# Altium PCB 辉光管时钟2号.pcbdoc (part 1 of 2)
Units mil, origin at the board's own origin, x right, y up, seen from the top; angles counter-clockwise.
Board outline 9093.95 x 3420 mil, 2 copper layers (Top Layer, Bottom Layer); 109 components, 221 nets, 539 pads, 88 vias.
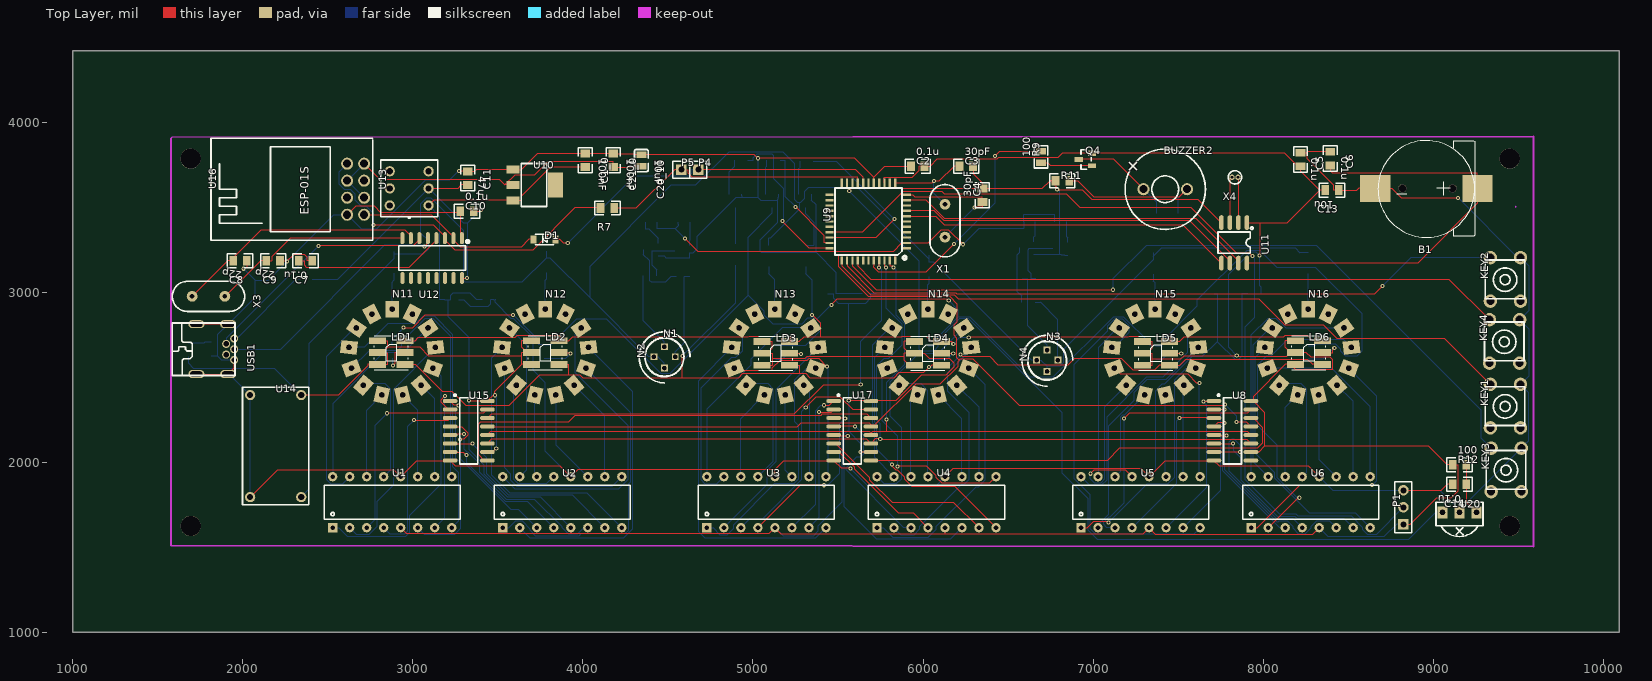
[diagram p0: Top Layer view]
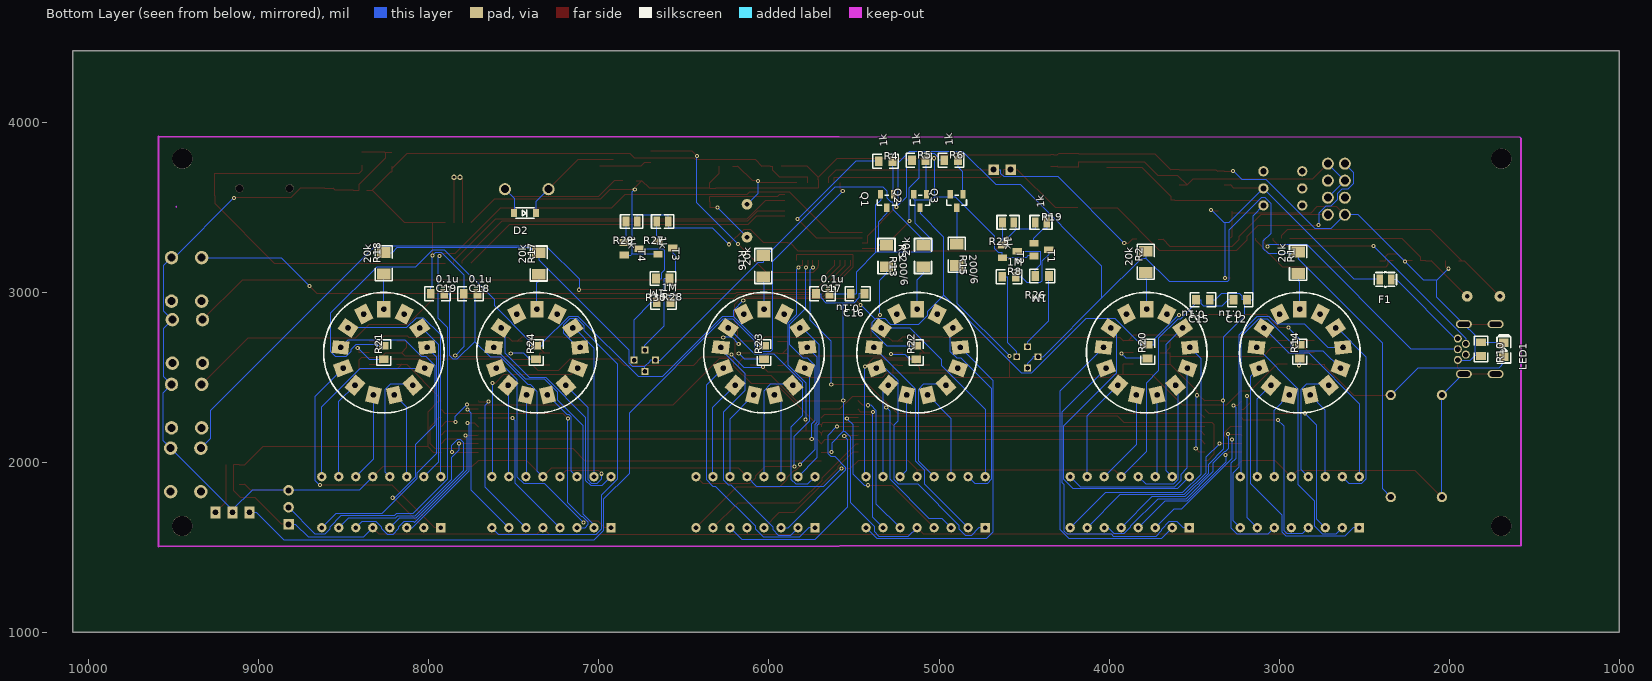
[diagram p1: Bottom Layer view, seen from below]

## Layer stack, top to bottom
Top Layer: signal copper (thickness not stored)
Dielectric: dielectric 12.6, FR-4, Dk 4.8
Bottom Layer: signal copper (thickness not stored)

## Board outline
10093.95,1000 1000,1000 1000,4420 10093.95,4420

## Components (designator, comment, footprint, x,y, rotation, side; value= is the part's Value field where it differs from the comment)
B1 "CR1220-2" BATTERY-2 8958.95,3610 r180 top
BUZZER2 "GMC1205YA-16R2048" GMC1205YA-12MM 7423.95,3605 r0 top
C1_0 "100nF" 0805#1 4013.95,3775 r270 top
C2 "0.1u" 0805#1 5968.95,3740 r0 top
C3 "30pF" 0805#1 6253.95,3740 r0 top
C4 "30pF" 0805#1 6348.95,3570 r90 top
C5 "0.1u" 0805#1 8218.95,3780 r270 top
C6 "0.1u" 0805#1 8393.95,3785 r270 top
C7 "0.1u" 0805#1 2368.95,3185 r180 top
C8 "22p" 0805#1 1983.95,3185 r180 top
C9 "22p" 0805#1 2178.95,3185 r180 top
C10 "0.1u" 0805#1 3318.95,3475 r0 top
C11 "47u" 0805#1 3323.95,3670 r270 top
C12 "0.1u" 0805#2 3228.95,2955 r180 bottom
C13 "10u" 0805#1 8403.95,3600 r180 top
C14 "0.1u" 0805#1 9153.95,1870 r180 top
C15 "0.1u" 0805#2 3448.95,2955 r180 bottom
C16 "0.1u" 0805#2 5478.95,2990 r180 bottom
C17 "0.1u" 0805#2 5683.95,2990 r0 bottom
C18 "0.1u" 0805#2 7753.95,2990 r0 bottom
C19 "0.1u" 0805#2 7948.95,2990 r0 bottom
C20_10 "10uF" CAP_0805 4343.95,3773.47 r270 top
C21_0 "100nF" 0805#1 4178.95,3775 r270 top
D1 "1N4148W" SOD-123#1 3773.95,3310 r0 top
D2 "1N4148W" SOD-123#2 7433.95,3465 r180 bottom
F1 "JK-SMD020SF" FUSE_0805 2375.49,3074.99 r180 bottom
KEY1 "TS-1102-5016" KEY-6.0*6.0-2 9423.95,2330 r90 top
KEY2 "TS-1102-5016" KEY-6.0*6.0-2 9423.95,3075 r90 top
KEY3 "TS-1102-5016" KEY-6.0*6.0-2 9428.95,1955 r90 top
KEY4 "TS-1102-5016" KEY-6.0*6.0-2 9418.95,2710 r90 top
LD1 "LED5050" LED5050 2873.95,2645 r0 top
LD2 "LED5050" LED5050 3778.95,2645 r0 top
LD3 "LED5050" LED5050 5133.95,2640 r0 top
LD4 "LED5050" LED5050 6028.95,2640 r0 top
LD5 "LED5050" LED5050 7368.95,2640 r0 top
LD6 "LED5050" LED5050 8268.95,2645 r0 top
LED1 "17-21SURC/S530-A2/TR8" LED-0805 1678.95,2661.35 r90 bottom
N1 "IN-3" IN-3 4463.95,2620 r0 top
N2 "IN-3" IN-3 4478.95,2600 r90 top
N3 "IN-3" IN-3 6713.95,2600 r0 top
N4 "IN-3" IN-3 6728.95,2580 r90 top
N11 "ИН-14" IN14 2878.95,2900 r0 top
N12 "ИН-14" IN14 3778.95,2900 r0 top
N13 "ИН-14" IN14 5128.95,2900 r0 top
N14 "ИН-14" IN14 6028.95,2900 r0 top
N15 "ИН-14" IN14 7363.95,2900 r0 top
N16 "ИН-14" IN14 8263.95,2900 r0 top
P1 "Header-Male-2.54_1x3" HDR-3X1/2.54 8823.95,1735 r90 top
P4 "Header-Male-2.54_1x1" HDR-1X1/2.54 4678.95,3720 r0 top
P5 "Header-Male-2.54_1x1" HDR-1X1/2.54 4578.95,3720 r0 top
Q1 "KST9013" SOT-23-3_3PIN_L2.90-W2.40-PITCH0.95-BR#1 5306.35,3535.63 r270 bottom
Q2 "KST9013" SOT-23-3_3PIN_L2.90-W2.40-PITCH0.95-BR#1 5111.55,3535.63 r270 bottom
Q3 "KST9013" SOT-23-3_3PIN_L2.90-W2.40-PITCH0.95-BR#1 4896.55,3535.63 r270 bottom
Q4 "KST9015" SOT-23-3_3PIN_L2.90-W2.40-PITCH0.95-BR#2 6953.95,3780 r0 top
R1 "20k" 1206 2888.95,3172.99 r270 bottom
R2 "20k" 1206 3783.95,3177.99 r270 bottom
R3 "20k" 1206 5093.95,3212.01 r270 bottom
R4 "1k" 0805#2 5313.95,3770 r0 bottom
R5 "1k" 0805#2 5118.95,3775 r0 bottom
R6 "1k" 0805#2 4928.95,3775 r0 bottom
R7 "100" 0805#1 4143.95,3495 r180 top
R8 "1M" 0805#2 4588.95,3090 r0 bottom
R9 "100" RES_0805#1 6693.95,3795 r90 top
R10 "1k" 0805#2 1813.95,2665 r90 bottom
R11 "100" 0805#1 6818.95,3655 r0 top
R12 "100" 0805#1 9153.95,1985 r0 top
R13 "200/6" 1206 5308.95,3212.01 r90 bottom
R14 "300" 0805#2 2878.95,2650 r270 bottom
R15 "200/6" 1206 4895.96,3220 r90 bottom
R16 "20k" 1206 6033.95,3152.99 r270 bottom
R17 "20k" 1206 7353.95,3167.99 r270 bottom
R18 "20k" 1206 8263.95,3170 r270 bottom
R19 "1k" RES_0805#2 4400.49,3410 r0 bottom
R20 "300" 0805#2 3773.95,2650 r270 bottom
R21 "300" 0805#2 8263.95,2645 r270 bottom
R22 "300" 0805#2 5133.95,2645 r270 bottom
R23 "300" 0805#2 6028.95,2645 r270 bottom
R24 "300" 0805#2 7368.95,2645 r270 bottom
R25 "1k" RES_0805#2 4593.95,3410 r180 bottom
R26 "1M" 0805#2 4393.95,3095 r180 bottom
R27 "1k" RES_0805#2 6625.49,3415 r180 bottom
R28 "1M" 0805#2 6618.95,2940 r0 bottom
R29 "1k" RES_0805#2 6807.41,3415 r180 bottom
R30 "1M" 0805#2 6623.95,3080 r180 bottom
T1 "BF820-NPN-SOT23-BEC" SOT23-BEC 4398.95,3250 r90 bottom
T2 "BF820-NPN-SOT23-BEC" SOT23-BEC 4583.95,3240 r90 bottom
T3 "BF820-NPN-SOT23-BEC" SOT23-BEC 6608.95,3260 r90 bottom
T4 "BF820-NPN-SOT23-BEC" SOT23-BEC 6806.95,3255 r90 bottom
U1 "K155ID1/SN74141" DIP16 2878.95,1765 r0 top
U2 "K155ID1/SN74141" DIP16 3878.95,1765 r0 top
U3 "K155ID1/SN74141" DIP16 5078.95,1765 r0 top
U4 "K155ID1/SN74141" DIP16 6078.95,1765 r0 top
U5 "K155ID1/SN74141" DIP16 7278.95,1765 r0 top
U6 "K155ID1/SN74141" DIP16 8278.95,1765 r0 top
U8 "74HC595D" SOP-16_150MIL 7818.95,2185 r0 top
U9 "STC15W4K48S4" LQFP-44 5678.95,3415 r90 top
U10 "AMS1117-3.3" SOT-223 3713.95,3630 r0 top
U11 "DS1302ZN+T&R" SOIC-8_150MIL 7828.95,3290 r270 top
U12 "CH340G" SOIC-16_150MIL 3113.95,3200 r180 top
U13 "K8-2213A-L1" KEY-8X8 2978.95,3610 r90 top
U14 "升压模块‘" SYMK2 2243.95,2095 r0 top
U15 "74HC595D" SOP-16_150MIL 3328.95,2185 r0 top
U16 "ESP-01S" ESP-01S 2663.95,3605 r90 top
U17 "74HC595D" SOP-16_150MIL 5583.95,2185 r0 top
U20 "VS1838B" VS1838B 9153.95,1705 r0 top
USB1 "Mini USB-B 5P-Female-TH_C46398" USB-MINI-2 1838.95,2665 r270 top
X1 "12MHz" OSC-49S-1 6128.95,3420 r180 top
X3 "12MHz" OSC-49S-1 1798.95,2975 r270 top
X4 "32.768KHz" 2*6 7833.95,3675 r180 top

## Footprints (in the part's own frame and the unit in brackets; to place one, negate y for a bottom-side part, rotate by r counter-clockwise, add the part's x,y. Pads: shape width x height; smd on the part's side, far side on the other; paste and mask are expansions set on the pad)
2*6 [mm]
  round 0.8 hole 0.4: 1(-0.45,0) 2(0.45,0)
  silkscreen extent -1,-1 1,1
0805#1 [mm]
  rect 1.16x1.45 smd: 1(-1.016,0) 2(1.016,0)
  silkscreen extent -1.9,-1.03 1.87,1.04
0805#2 [mm]
  rect 1.16x1.45 smd: 1(1.016,0) 2(-1.016,0)
  silkscreen extent -1.87,-1.04 1.9,1.03
1206 [mil]
  rect 63x78.74 smd: 1(62.99,0) 2(-62.99,0)
  silkscreen extent -103,-50 103,50
BATTERY-2 [mm]
  round 1.2 hole 1.2: 0(-3.912,0) 0(3.581,0)
  rect 4.5x4 smd: 1(-7.62,0) 2(7.62,0)
  silkscreen extent -7.22,-7.14 7.22,7.3
CAP_0805 [mm]
  rect 1x1.5 smd: 1(-0.85,0) 2(0.85,0)
  silkscreen extent -1.65,-1.02 1.65,1.02
DIP16 [mil]
  rect 55x55 hole 28: 1(-350,-150)
  round 55 hole 28: 2(-250,-150) 3(-150,-150) 4(-50,-150) 5(50,-150) 6(150,-150) 7(250,-150) 8(350,-150) 9(350,150) 10(250,150) 11(150,150) 12(50,150) 13(-50,150) 14(-150,150) 15(-250,150) 16(-350,150)
  silkscreen extent -400,-100 400,100
ESP-01S [mm]
  round 1.8 hole 1.2: 1(-3.81,1.27) 2(-1.27,1.27) 3(1.27,1.27) 4(3.81,1.27) 5(3.81,-1.27) 6(1.27,-1.27) 7(-1.27,-1.27) 8(-3.81,-1.27)
  silkscreen extent -7.62,-2.54 7.62,21.59
FUSE_0805 [mm]
  rect 1x1.5 smd: 1(0.85,0) 2(-0.85,0)
  silkscreen extent -1.65,-1.14 1.65,1.14
GMC1205YA-12MM [mm]
  round 1.8 hole 1.2: 1(-3.25,0) 2(3.25,0)
  silkscreen extent -6,-6 6,6
HDR-1X1/2.54 [mil]
  rect 62x62 hole 35: 1(0,0)
  silkscreen extent -50,-50 50,50
HDR-3X1/2.54 [mil]
  rect 62x62 hole 35: 1(-100,0)
  round 62 hole 35: 2(0,0) 3(100,0)
  silkscreen extent -150,-50 150,50
IN14 [mil]
  rect 78.74x98.42 hole 30 slot 30.2 at 0 deg: 1(0,0)
  rect 98.28x78.74 hole 30 slot 30.2 at 27.69 deg rot 117.7: 2(-118.92,-29.31)
  rect 98.28x78.74 hole 30 slot 30.2 at 55.38 deg rot 145.39: 3(-210.6,-110.53)
  rect 98.28x78.74 hole 30 slot 30.2 at 83.08 deg rot 173.09: 4(-254.04,-225.06)
  rect 98.28x78.75 hole 30 slot 30.2 at 110.77 deg rot 20.76: 5(-239.28,-346.65)
  rect 98.28x78.74 hole 30 slot 30.2 at 138.46 deg rot 48.46: 6(-169.7,-447.45)
  rect 98.28x78.74 hole 30 slot 30.2 at 166.15 deg rot 76.16: 7(-61.25,-504.37)
  rect 98.28x78.74 hole 30 slot 30.2 at 13.85 deg rot 103.84: 8(61.23,-504.38)
  rect 98.28x78.74 hole 30 slot 30.2 at 41.54 deg rot 131.54: 9(169.69,-447.46)
  rect 98.28x78.74 hole 30 slot 30.2 at 69.23 deg rot 159.23: 10(239.27,-346.66)
  rect 98.28x78.74 hole 30 slot 30.2 at 96.92 deg rot 6.91: 11(254.04,-225.06)
  rect 98.28x78.74 hole 30 slot 30.2 at 124.62 deg rot 34.61: 12(210.6,-110.53)
  rect 98.28x78.74 hole 30 slot 30.2 at 152.31 deg rot 62.3: 13(118.92,-29.31)
IN-3 [mm]
  rect 1.024x1.024 hole 0.6 slot 0.605 at 0 deg: A(-1.175,0) K(2,0)
  silkscreen extent -3.4,-2.9 4.22,3.73
KEY-6.0*6.0-2 [mm]
  round 2 hole 1.2: 1(3.25,-2.25) 2(-3.25,-2.25) 3(3.25,2.25) 4(-3.25,2.25)
  silkscreen extent -2.9,-2.9 2.9,3
KEY-8X8 [mil]
  round 60 hole 36: 1(-100.4,-114.17) 2(0,-114.17) 3(100.4,-114.17) 4(-100.37,114.17) 5(0,114.17) 6(100.39,114.17)
  silkscreen extent -176,-167 167,167
LED5050 [mil]
  rect 100x39.37 smd: 1(-80,70) 2(-80,0) 3(-80,-70) 4(80,-70) 5(80,0) 6(80,70)
  silkscreen extent -100,-100 100,100
LED-0805 [mil]
  rect 51.2x55.1 smd: 1(-41.35,0) 2(41.35,0)
  silkscreen extent -78,-40 88,41
LQFP-44 [mil]
  rect 13.8x47.24 smd: 1(-157,-228) 2(-126,-228) 3(-94,-228) 4(-63,-228) 5(-31,-228) 6(0,-228) 7(31,-228) 8(63,-228) 9(94,-228) 10(126,-228) 11(157,-228) 23(157,228) 24(126,228) 25(94,228) 26(63,228) 27(31,228) 28(0,228) 29(-31,228) 30(-63,228) 31(-94,228) 32(-126,228) 33(-157,228)
  rect 47.24x13.8 smd: 12(228,-157) 13(228,-126) 14(228,-94) 15(228,-63) 16(228,-31) 17(228,0) 18(228,31) 19(228,63) 20(228,94) 21(228,126) 22(228,157) 34(-228,157) 35(-228,126) 36(-228,94) 37(-228,63) 38(-228,31) 39(-228,0) 40(-228,-31) 41(-228,-63) 42(-228,-94) 43(-228,-126) 44(-228,-157)
  silkscreen extent -223,-223 197,197
OSC-49S-1 [mm]
  round 1.6 hole 0.7: 1(0,2.45) 2(0,-2.45)
  silkscreen extent -2.25,-5.39 2.25,5.39
RES_0805#1 [mm]
  rect 1x1.5 smd: 1(-0.85,0) 2(0.85,0)
  silkscreen extent -1.65,-1.02 1.65,1.02
RES_0805#2 [mm]
  rect 1x1.5 smd: 1(0.85,0) 2(-0.85,0)
  silkscreen extent -1.65,-1.02 1.65,1.02
SOD-123#1 [mil]
  rect 35.8x48 smd: 1(64,0) 2(-64,0)
  silkscreen extent -53,-31 53,31
SOD-123#2 [mil]
  rect 35.8x48 smd: 1(-64,0) 2(64,0)
  silkscreen extent -53,-31 53,31
SOIC-8_150MIL [mm]
  oval 2.2x0.7 smd: 1(-3.023,1.905) 2(-3.023,0.635) 3(-3.023,-0.635) 4(-3.023,-1.905) 5(3.023,-1.905) 6(3.023,-0.635) 7(3.023,0.635) 8(3.023,1.905)
  silkscreen extent -2.37,-2.41 1.55,2.83
SOIC-16_150MIL [mm]
  oval 0.6x1.8 smd: 1(-4.445,-2.972) 2(-3.175,-2.972) 3(-1.905,-2.972) 4(-0.635,-2.972) 5(0.635,-2.972) 6(1.905,-2.972) 7(3.175,-2.972) 8(4.445,-2.972) 9(4.445,2.972) 10(3.175,2.972) 11(1.905,2.972) 12(0.635,2.972) 13(-0.635,2.972) 14(-1.905,2.972) 15(-3.175,2.972) 16(-4.445,2.972)
  silkscreen extent -5.51,-2.69 4.98,1.83
SOP-16_150MIL [mm]
  oval 2.2x0.6 smd: 1(-2.769,4.445) 2(-2.769,3.175) 3(-2.769,1.905) 4(-2.769,0.635) 5(-2.769,-0.635) 6(-2.769,-1.905) 7(-2.769,-3.175) 8(-2.769,-4.445) 9(2.769,-4.445) 10(2.769,-3.175) 11(2.769,-1.905) 12(2.769,-0.635) 13(2.769,0.635) 14(2.769,1.905) 15(2.769,3.175) 16(2.769,4.445)
  silkscreen extent -2.21,-4.95 1.35,5.46
SOT23-BEC [mil]
  rect 39.4x55.1 smd: B(37,43) C(0,-43) E(-37,43)
SOT-23-3_3PIN_L2.90-W2.40-PITCH0.95-BR#1 [mm]
  rect 1.25x0.7 smd: 1(-1,0.95)
  rect 1.25x0.8 smd: 2(-1,-0.95) 3(1,0)
  silkscreen extent -0.9,-1.46 0.65,1.46
SOT-23-3_3PIN_L2.90-W2.40-PITCH0.95-BR#2 [mm]
  rect 1.25x0.7 smd: 1(1,-0.95)
  rect 1.25x0.8 smd: 2(1,0.95) 3(-1,0)
  silkscreen extent -0.65,-1.46 0.9,1.46
SOT-223 [mm]
  rect 2x1.2 smd: 1(-3.175,2.3) 2(-3.175,0) 3(-3.175,-2.3)
  rect 2.3x3.8 smd: 4(3.175,0)
  silkscreen extent -1.93,-3.2 1.87,3.2
SYMK2 [mil]
  round 60 hole 36: 1(-200,300) 2(-200,-300) 3(100,300) 4(100,-300)
  silkscreen extent -245,-345 145,345
USB-MINI-2 [mm]
  oval 1.2x2.4 hole 0.8 slot 1.8 at 90 deg: 0(-3.72,1.924) 0(-3.72,-2.826) 0(3.72,1.924) 0(3.72,-2.826)
  round 1.2 hole 0.8: 1(-1.58,2.826) 2(-0.78,1.622) 3(0.02,2.826) 4(0.82,1.622) 5(1.62,2.826)
  silkscreen extent -3.89,-6.42 3.96,2.93
VS1838B [mil]
  rect 60x70 hole 30 slot 30.2 at 0 deg: 1(-100,0)
  rect 60x69.88 hole 30 slot 30.2 at 0 deg: 2(0,0) 3(100,0)
  silkscreen extent -138,-142 138,59

## Free pads (board coordinates)
  round 119 hole 119: 2(1693.95,1625) 2(1693.95,3785) 2(9448.95,1625) 2(9448.95,3785)

## Via types
v1: diameter 24, hole 12, Top Layer to Bottom Layer, 88 vias

## Nets (pads, with @x,y where several pads share a name; then routed paths per layer and width w, separated by ;. In a path a pad name is that pad's centre, name@x,y a point inside that pad or via, vN(x,y) a via of type N, cw(c..) or ccw(c..) an arc to the next point about the centre after c; other vN are vias at no path point)
180V: N1.A N2.A N3.A N4.A R1.2 R2.2 R3.2 R16.2 R17.2 R18.2 U14.4 | length 10577.8
  Bottom Layer w6: U14.4@2343.95,1795 2392.35,1843.4 2392.35,2698.7 2888.95,3195.4 R1.2@2888.95,3225.2 ; R1.2@2888.95,3235.98 R1.2@2888.95,3225.2 ; R2.2@3783.95,3240.98 3783.95,3200.4 ; N2.A@4478.95,2553.74 4478.95,2583 4446.95,2615 4446.95,2620 4432.35,2620 4417.65,2620 4388.45,2620 4042.25,2966.1 ; R3.2@5093.95,3275 5093.95,3315.6 5100.75,3315.6 5271.55,3486.4 5271.55,3527.6 ; R16.2@6033.95,3215.98 R16.2@6033.95,3195.9 ; N4.A@6728.95,2533.74 6728.95,2563 ; R17.2@7353.95,3230.98 R17.2@7353.95,3210.7 ; R18.2@8263.95,3232.99 8215.45,3233 8188.85,3259.6 7402.85,3259.6 R17.2@7353.95,3210.7 ; R1.2@2888.95,3225.2 3062.25,3225.2 3093.15,3256.1 3093.15,3301.5 3048.15,3346.5 3048.15,3520 3081.95,3553.7 3107.05,3553.7 3295.85,3365 3295.85,3069.4 3304.45,3060.8 3644.45,3060.8 3783.95,3200.4 ; 3783.95,3200.4 3808.05,3200.4 4042.25,2966.1 ; 4042.25,2966.1 4042.25,3152.8 4520.15,3630.6 4664.75,3630.6 4860.15,3825.9 5173.95,3825.9 5242.05,3757.9 5242.05,3546.2 5260.75,3527.6 5271.55,3527.6 ; 5271.55,3527.6 5281.95,3527.6 5305.45,3551 5305.45,3594 5326.85,3615.4 5614.55,3615.4 R16.2@6033.95,3195.9 ; R16.2@6033.95,3195.9 6033.95,3175.4 6063.05,3175.4 6638.45,2600 6667.65,2600 6682.35,2600 6696.95,2600 6696.95,2595 6728.95,2563 ; 6728.95,2563 6802.85,2563 6824.15,2584.3 6824.15,2660.6 7353.95,3190.4 R17.2@7353.95,3210.7
C3_1: C3.1 U9.12 X1.2 | length 582.1
  Top Layer w6: U9.12@5835.95,3643 6053.25,3643 v1(6063.75,3653.4) 6095.45,3653.4 6182.05,3740 C3.1@6213.95,3740
  Bottom Layer w6: v1(6063.75,3653.4) 6063.75,3581.7 X1.2@6128.95,3516.46
C4_1: C4.1 U9.11 X1.1 | length 802.3
  Top Layer w6: U9.11@5906.95,3572 5939.65,3572 5949.75,3561.9 6348.95,3561.9 C4.1@6348.95,3530 6348.95,3498.1 v1(6303.45,3498.1)
  Bottom Layer w6: X1.1@6128.95,3323.54 v1(6303.45,3498.1)
C6_2: B1.1 C6.2 U11.8 | length 2579.3
  Top Layer w6: U11.8@7903.95,3171 8907.75,3171 9258.95,3522.2 9258.95,3566.1 B1.1@9258.95,3610 9258.95,3697.8 8409.15,3697.8 8393.95,3713.1 C6.2@8393.95,3745
CH340-D+: U12.5 USB1.3 | length 1432.8
  Top Layer w6: v1(3069.95,3269.2) 3088.95,3288.2 U12.5@3088.95,3317
  Bottom Layer w6: USB1.3@1950.2,2664.21 2222.35,2664.2 2835.65,3277.5 3061.55,3277.5 v1(3069.95,3269.2)
CH340-D-: U12.6 USB1.2 | length 1417.2
  Top Layer w6: v1(2446.55,3272.3) 3002.05,3272.3 3038.95,3309.3 U12.6@3038.95,3317
  Bottom Layer w6: USB1.2@1902.81,2695.71 1902.85,2728.5 v1(2446.55,3272.3)
D2_1: BUZZER2.2 D2.1 R11.2 | length 913.6
  Top Layer w6: R11.2@6858.95,3655 6890.85,3655 6908.05,3655 7003.35,3559.7 7506.55,3559.7 BUZZER2.2@7551.95,3605
  Bottom Layer w6: D2.1@7497.95,3465 7497.95,3551 BUZZER2.2@7551.95,3605
D2_2: BUZZER2.1 D2.2 Q4.3 | length 624.6
  Top Layer w6: Q4.3@6914.58,3780 7121.05,3780 BUZZER2.1@7296,3605
  Bottom Layer w6: BUZZER2.1@7296,3605 7369.95,3531 D2.2@7369.95,3465
GND: B1.2 C1_0.1 C2.1 C3.2 C4.2 C5.1 C6.1 C7.1 C8.1 C9.1 C10.1 C11.1 C12.2 C13.1 C14.2 C15.2 C16.2 C17.2 C18.2 C19.2 C20_10.1 C21_0.1 KEY1.1 KEY2.1 KEY3.1 KEY4.1 P1.3 Q1.2 Q2.2 Q3.2 R10.2 R11.1 T1.E T2.E T3.E T4.E U1.12 U2.12 U3.12 U4.12 U5.12 U6.12 U8.8 U9.16 U10.1 U11.4 U12.1 U14.1 U14.2 U15.8 U16.1 U17.8 U20.2 USB1.0 USB1.5 | length 28039.1
  Top Layer w6: USB1.0@1727.65,2518.5 1914.75,2518.5 1950.25,2554 USB1.5@1950.2,2601.22 ; USB1.0@1727.65,2811.4 USB1.0@1914.75,2811.4 ; v1(2005.65,3137.7) 2015.35,3147.4 2023.95,3147.4 C8.1@2023.95,3185 ; U14.2@2043.95,1795 2203.15,1954.2 2889.75,1954.2 U1.12@2928.95,1915 3023.95,2010 U15.8@3219.95,2010 3253.65,1976.3 3867.65,1976.3 U2.12@3928.95,1915 3970.45,1956.5 5128.95,1956.5 ; C9.1@2218.95,3185 2250.85,3185 2254.45,3185 v1(2260.05,3179.4) 2260.05,3181 2301.65,3222.6 2363.35,3222.6 2377.05,3208.9 2377.05,3185 C7.1@2408.95,3185 ; U16.1@2613.95,3455 2663.95,3505 2775.65,3505 2812.65,3468 C10.1@3278.95,3468 ; v1(3271.25,3713.2) 3283.15,3713.2 3286.35,3710 C11.1@3323.95,3710 3361.55,3710 3372.15,3720.5 3540.45,3720.5 3588.95,3720.5 3637.45,3720.5 3731.85,3815 C1_0.1@4013.95,3815 C21_0.1@4178.95,3815 4297.25,3815 4305.35,3806.9 4324.65,3806.9 C20_10.1@4343.95,3806.93 5008.95,3806.9 v1(5028.85,3787.1) 5598.65,3787.1 5709.95,3675.7 ; C10.1@3278.95,3475 C10.1@3278.95,3468 ; U12.1@3288.95,3317 3278.95,3327 C10.1@3278.95,3468 ; U3.12@5128.95,1915 5128.95,1956.5 ; v1(5573.35,1964.3) 5520.65,1964.3 U17.8@5474.95,2010 5182.45,2010 5128.95,1956.5 ; C2.1@5928.95,3740 5774.25,3740 5709.95,3675.7 ; U4.12@6128.95,1915 6177.65,1963.7 7280.25,1963.7 U5.12@7328.95,1915 7423.95,2010 U8.8@7709.95,2010 7744.65,1975.3 8268.65,1975.3 U6.12@8328.95,1915 ; C3.2@6293.95,3740 6293.95,3696.9 6348.95,3641.9 C4.2@6348.95,3610 ; R11.1@6778.95,3655 6747.05,3655 ; U11.4@7753.95,3409 7615.45,3547.5 6991.55,3547.5 6936.35,3602.8 v1(6788.75,3602.8) 6788.75,3613.3 6747.05,3655 ; C5.1@8218.95,3820 8253.55,3820 8256.55,3820 ; C6.1@8393.95,3825 8261.55,3825 8256.55,3820 ; P1.3@8823.95,1835 9047.05,1835 9082.05,1870 C14.2@9113.95,1870 ; v1(9145.25,3554.5) 8812.05,3554.5 8756.65,3610 B1.2@8658.95,3610 8610.15,3610 8561.25,3610 8551.25,3600 C13.1@8443.95,3600 8412.05,3600 8412.05,3631.9 8256.55,3787.4 8256.55,3820 ; 5709.95,3675.7 5709.95,3659.4 U9.16@5709.95,3643 5709.95,3613.3 5713.25,3610 6311.35,3610 C4.2@6348.95,3610 ; C4.2@6348.95,3610 6702.05,3610 6747.05,3655
  Bottom Layer w6: R10.2@1813.95,2625 1851.55,2625 ; USB1.0@1914.75,2518.5 1920.45,2518.5 U14.1@2043.95,2395 U14.2@2043.95,1795 ; USB1.5@1950.2,2601.22 1948.95,2600 1876.55,2600 1851.55,2625 ; v1(2005.65,3137.7) 2074.45,3068.8 ; C12.2@3268.95,2955 3300.85,2955 3338.55,2917.3 3443.35,2917.3 3457.05,2931 3457.05,2955 3477.05,2955 C15.2@3483.45,2955 ; v1(3271.25,3713.2) 3218.25,3660.2 3076.85,3660.2 2787.85,3371.2 2697.75,3371.2 U16.1@2613.95,3455 2535.65,3455 v1(2260.05,3179.4) 2149.45,3068.8 2074.45,3068.8 ; C15.2@3488.95,2955 C15.2@3483.45,2955 ; U2.12@3928.95,1915 3778.95,2065 3778.95,2468.2 3707.65,2539.4 3707.65,2730.8 3593.75,2844.7 3580.05,2844.7 3483.45,2941.3 C15.2@3483.45,2955 ; T1.E@4441.95,3213 4478.65,3213 4488.65,3203 T2.E@4626.95,3203 4626.95,3231.8 4648.55,3231.8 4672.15,3255.4 4672.15,3328.4 4901.85,3558.1 Q3.2@4933.95,3558.1 ; Q3.2@4933.95,3575 4933.95,3566.6 Q3.2@4933.95,3558.1 ; v1(5028.85,3787.1) 5028.85,3558.1 ; Q2.2@5148.95,3575 5148.95,3558.1 5148.95,3548.1 5142.05,3541.3 ; Q1.2@5343.75,3575 5343.75,3541.3 5370.65,3514.4 5370.65,3234.4 ; v1(5573.35,1964.3) 5677.45,1860.1 6074.15,1860.1 U4.12@6128.95,1915 ; C17.2@5643.95,2990 C16.2@5518.95,2990 5487.05,2990 5487.05,3118 5370.65,3234.4 ; T3.E@6651.95,3223 6802.75,3223 ; v1(6788.75,3602.8) 6802.75,3588.8 6802.75,3223 ; T4.E@6849.95,3218 6831.65,3218 6813.35,3218 6808.35,3223 6802.75,3223 ; U5.12@7328.95,1915 7363.95,1950 7363.95,2417.3 7404.65,2458 7418.25,2458 7579.85,2619.6 7639.95,2619.6 7729.95,2709.6 ; C18.2@7713.95,2990 7729.95,2990 7729.95,2709.6 ; C19.2@7908.95,2990 7877.05,2990 7877.05,2626.7 7855.55,2605.3 7834.25,2605.3 7729.95,2709.6 ; U6.12@8328.95,1915 8408.95,1835 P1.3@8823.95,1835 9038.35,1835 U20.2@9153.95,1719.4 ; v1(9145.25,3554.5) 9496.85,3202.9 9512.55,3202.9 9561.05,3154.5 9561.05,2891.4 9507.55,2837.9 9561.05,2784.5 9561.05,2506.4 9512.55,2457.9 9562.05,2408.4 9562.05,2127.5 9517.55,2082.9 U20.2@9153.95,1719.4 ; U20.2@9153.95,1705 U20.2@9153.95,1719.4 ; 1851.55,2625 1851.55,2748.3 1914.75,2811.4 2074.45,2971.2 2074.45,3068.8 ; Q3.2@4933.95,3558.1 5028.85,3558.1 ; 5028.85,3558.1 5045.75,3541.3 5142.05,3541.3 ; 5142.05,3541.3 5142.05,3407.1 5039.25,3304.3 5039.25,3243.1 5047.95,3234.4 5370.65,3234.4
KEY1_2: KEY1.2
KEY1_4: KEY1.4
KEY2_2: KEY2.2
KEY2_4: KEY2.4
KEY3_2: KEY3.2
KEY3_4: KEY3.4
KEY4_2: KEY4.2
KEY4_4: KEY4.4
LD1: LD1.6 LD2.6 LD3.6 LD4.6 LD5.6 LD6.6 R13.2 | length 6071.4
  Top Layer w6: LD1.6@2953.95,2715 3013.05,2715 3033.45,2735.4 3603.25,2735.4 3613.45,2745.5 3857.95,2745.5 LD2.6@3888.55,2715 ; LD2.6@3858.95,2715 LD2.6@3888.55,2715 ; LD3.6@5213.95,2710 LD3.6@5243.55,2710 ; v1(5348.15,2866.4) 5398.05,2816.5 5398.05,2735.4 ; v1(6177.75,2694.4) 6168.05,2704 6168.05,2710 LD4.6@6108.95,2710 6079.45,2710 6049.85,2710 6021.05,2738.8 5874.45,2738.8 5871.05,2735.4 5398.05,2735.4 ; v1(6268.65,2733.8) 7206.95,2733.8 7211.95,2738.8 7449.75,2738.8 LD5.6@7478.55,2710 ; LD5.6@7448.95,2710 LD5.6@7478.55,2710 ; LD6.6@8348.95,2715 8289.85,2715 8261.05,2743.8 8126.05,2743.8 8117.75,2735.4 7533.45,2735.4 7508.05,2710 LD5.6@7478.55,2710 ; LD2.6@3888.55,2715 3918.05,2715 3938.45,2735.4 4973.55,2735.4 4976.95,2738.8 5214.75,2738.8 LD3.6@5243.55,2710 ; LD3.6@5243.55,2710 5273.05,2710 5298.45,2735.4 5398.05,2735.4
  Bottom Layer w6: R13.2@5308.95,3149.02 5308.95,3108.4 5348.15,3069.3 v1(5348.15,2866.4) ; v1(6177.75,2694.4) 6217.15,2733.8 v1(6268.65,2733.8)
LD1_5: LD1.5 R14.1 | length 183.7
  Top Layer w6: v1(2883.15,2568.5) 2894.85,2580.2 2894.85,2645 LD1.5@2953.95,2645
  Bottom Layer w6: R14.1@2878.95,2610 2878.95,2572.6 v1(2883.15,2568.5)
LD2: Q2.3 R14.2 R20.2 R21.2 R22.2 R23.2 R24.2 | length 9085.9
  Top Layer w6: v1(2945.25,2791.3) 2998.65,2791.3 3073.15,2865.8 v1(3589.85,2865.8) ; v1(5461.15,2924.8) 5496.75,2960.5 6141.45,2960.5 v1(6150.95,2951)
  Bottom Layer w6: R14.2@2878.95,2690 2878.95,2721.9 2945.25,2788.2 v1(2945.25,2791.3) ; v1(3589.85,2865.8) 3736.35,2719.3 3736.35,2690 R20.2@3773.95,2690 3811.55,2690 3965.45,2843.8 4137.95,2843.8 4458.05,2523.7 4514.35,2523.7 4972.05,2981.4 ; Q2.3@5111.55,3496.26 5111.55,3462.5 4972.05,3323 4972.05,2981.4 ; R22.2@5133.95,2685 5308.75,2685 5396.15,2772.4 5396.15,2819.6 5375.95,2839.7 ; v1(5461.15,2924.8) 5375.95,2839.7 ; R23.2@6028.95,2685 6030.35,2685 6066.55,2685 6066.55,2714.2 6208.35,2855.9 ; v1(6150.95,2951) 6208.35,2893.6 6208.35,2855.9 ; R21.2@8263.95,2685 8301.55,2685 8309.75,2693.1 8426.75,2693.1 8454.85,2665 8454.85,2652.5 8484.85,2622.6 8548.75,2622.6 8578.55,2652.4 8578.55,2876.2 8307.15,3147.6 8078.85,3147.6 7978.95,3247.5 7906.15,3247.5 7613.25,2954.6 7613.25,2919.1 7406.55,2712.4 7406.55,2685 R24.2@7368.95,2685 7331.35,2685 7331.35,2702.1 7177.15,2856.3 7120.65,2856.3 6766.75,2502.5 6627.55,2502.5 6274.05,2855.9 6208.35,2855.9 ; 4972.05,2981.4 5066.45,2887.1 5066.45,2864.4 5118.95,2811.9 5285.85,2811.9 5319.25,2845.3 5370.35,2845.3 5375.95,2839.7
LD2.1: LD2.5 R20.1 | length 236.9
  Top Layer w6: LD2.5@3858.95,2645 3918.05,2645 3924.35,2638.7 v1(3927.65,2638.7)
  Bottom Layer w6: R20.1@3773.95,2610 3898.95,2610 v1(3927.65,2638.7)
LD2.2: LD3.5 R22.1 | length 231.1
  Top Layer w6: LD3.5@5213.95,2640 5273.05,2640 5277.25,2635.8 v1(5282.25,2635.8)
  Bottom Layer w6: R22.1@5133.95,2605 5171.55,2605 5202.45,2635.8 v1(5282.25,2635.8)
LD2.3: LD4.5 R23.1 | length 231.7
  Top Layer w6: LD4.5@6108.95,2640 v1(6177.55,2640)
  Bottom Layer w6: R23.1@6028.95,2605 6142.55,2605 v1(6177.55,2640)
LD2.4: LD5.5 R24.1 | length 232.5
  Top Layer w6: LD5.5@7448.95,2640 7508.05,2640 v1(7517.95,2640)
  Bottom Layer w6: R24.1@7368.95,2605 7406.55,2605 7441.55,2640 v1(7517.95,2640)
LD2.5: LD6.5 R21.1 | length 271.5
  Top Layer w6: LD6.5@8348.95,2645 8408.05,2645 8408.05,2662.4 v1(8417.65,2672)
  Bottom Layer w6: R21.1@8263.95,2605 8350.65,2605 v1(8417.65,2672)
LD3: LD1.4 LD2.4 LD3.4 LD4.4 LD5.4 LD6.4 R15.2 | length 6855.8
  Top Layer w6: LD1.4@2953.95,2575 3014.65,2575 3173.05,2416.5 3229.75,2416.5 3311.25,2335 3567.05,2335 3745.65,2513.5 3918.05,2513.5 ; LD2.4@3858.95,2575 3918.05,2575 3918.05,2513.5 ; v1(4585.65,2625.4) 4585.65,2497.2 ; LD3.4@5213.95,2570 5243.55,2570 5273.05,2570 5273.05,2521.7 ; LD4.4@6108.95,2570 6079.45,2570 6049.85,2570 6039.15,2559.3 v1(6035.05,2559.3) 6003.55,2527.8 5860.75,2527.8 5829.25,2496.3 5334.65,2496.3 5309.25,2521.7 5273.05,2521.7 ; v1(6220.15,2632.3) 6232.95,2619.6 6394.55,2619.6 6443.45,2570.7 6851.55,2570.7 6888.85,2608 7166.85,2608 7234.65,2540.2 7360.05,2540.2 7389.85,2570 LD5.4@7448.95,2570 7478.55,2570 7508.05,2570 7543.95,2605.9 8258.95,2605.9 8289.85,2575 LD6.4@8348.95,2575 ; 3918.05,2513.5 3982.25,2513.5 3998.65,2497.2 4585.65,2497.2 ; 4585.65,2497.2 4916.45,2497.2 4940.95,2521.7 5273.05,2521.7
  Bottom Layer w6: v1(4585.65,2625.4) 4895.95,2935.7 R15.2@4895.96,3157.01 ; v1(6035.05,2559.3) 6147.15,2559.3 v1(6220.15,2632.3)
LED1_2: LED1.2 R10.1 | length 136
  Bottom Layer w6: LED1.2@1678.95,2702.7 1774.05,2702.7 1776.35,2705 R10.1@1813.95,2705
N1_K: N1.K R8.1 | length 524.4
  Bottom Layer w6: N1.K@4542.65,2620 4542.65,2649.2 4597.05,2703.6 4597.05,3090 R8.1@4628.95,3090
N11_1: N11.1 R1.1 | length 214.1
  Bottom Layer w6: N11.1@2878.95,2900 2878.95,3059.4 2888.95,3069.4 R1.1@2888.95,3110
N11_2: N11.2
N11_13: N11.13
N12_1: N12.1 R2.1 | length 217.1
  Bottom Layer w6: N12.1@3778.95,2900 3778.95,3069.4 3783.95,3074.4 R2.1@3783.95,3115
N12_2: N12.2
N12_13: N12.13
N13_1: N13.1 R3.1 | length 263.5
  Bottom Layer w6: R3.1@5093.95,3149.02 5093.95,3108.4 5128.95,3073.4 N13.1@5128.95,2900
N13_2: N13.2
N13_13: N13.13
N14_1: N14.1 R16.1 | length 192.1
  Bottom Layer w6: N14.1@6028.95,2900 6028.95,3044.4 6033.95,3049.4 R16.1@6033.95,3090
N14_2: N14.2
N14_13: N14.13
N15_1: N15.1 R17.1 | length 209.1
  Bottom Layer w6: R17.1@7353.95,3105 7353.95,3064.4 7363.95,3054.4 N15.1@7363.95,2900
N15_2: N15.2
N15_13: N15.13
N16_1: N16.1 R18.1 | length 207
  Bottom Layer w6: N16.1@8263.95,2900 R18.1@8263.95,3107.01
N16_2: N16.2
N16_13: N16.13
P0.0: R9.2 U9.40 | length 1494.2
  Top Layer w6: U9.40@5709.95,3187 5709.95,3154.3 5709.95,3146.9 5740.95,3115.9 6014.55,3115.9 v1(6181.15,3282.5) ; v1(6423.25,3801.3) 6450.45,3828.5 R9.2@6693.95,3828.46
  Bottom Layer w6: v1(6181.15,3282.5) 6423.25,3524.6 v1(6423.25,3801.3)
P0.1: U9.41 U15.14 | length 3063.8
  Top Layer w6: U15.14@3437.95,2260 3463.65,2285.7 5243.65,2285.7 5414.85,2456.9 v1(5633.65,2456.9) ; v1(5741.95,3144.8) U9.41@5741.95,3187
  Bottom Layer w6: v1(5633.65,2456.9) 5633.65,2712.1 5755.95,2834.3 5755.95,3130.8 v1(5741.95,3144.8)
P0.2: U8.11 U9.42 U15.11 U17.11 | length 5710.1
  Top Layer w6: U15.11@3437.95,2110 3461.75,2133.8 5669.15,2133.8 U17.11@5692.95,2110 5719.75,2136.8 v1(5748.35,2136.8) 5749.85,2135.3 7902.65,2135.3 U8.11@7927.95,2110 ; U9.42@5772.95,3187 5772.95,3153.8 v1(5782.35,3144.3)
  Bottom Layer w6: v1(5748.35,2136.8) 5748.35,2225.7 5728.35,2245.7 5728.35,2567.6 5771.75,2611 5797.85,2611 5876.75,2690 5876.75,2811.7 5782.35,2906.1 v1(5782.35,3144.3)
P0.3: U8.12 U9.43 U15.12 U17.12 | length 5618.4
  Top Layer w6: U15.12@3437.95,2160 3458.85,2180.9 5683.05,2180.9 U17.12@5692.95,2171 ; U17.12@5692.95,2160 U17.12@5692.95,2171 ; v1(5784.35,2250) 5784.35,2180.9 ; U9.43@5804.95,3187 5804.95,3154.3 5817.85,3154.3 v1(5827.35,3144.8) ; U8.12@7927.95,2160 7907.05,2180.9 5784.35,2180.9 ; U17.12@5692.95,2171 5702.85,2180.9 5784.35,2180.9
  Bottom Layer w6: v1(5784.35,2250) 5784.35,2467.8 5888.95,2572.3 5888.95,2816.7 5839.45,2866.1 5839.45,3132.7 v1(5827.35,3144.8)
P0.4: U8.13 U9.44 U15.13 U17.13 | length 6452.2
  Top Layer w6: U15.13@3437.95,2210 5261.65,2210 5283.05,2231.4 5682.25,2231.4 U17.13@5692.95,2220.7 ; U17.13@5692.95,2210 U17.13@5692.95,2220.7 ; U9.44@5835.95,3187 5835.95,3219.7 5506.05,3219.7 5504.25,3218 5504.25,3148 5679.65,2972.6 6159.15,2972.6 6201.95,2929.8 6201.95,2826.4 6183.05,2807.5 6183.05,2745.9 6199.05,2729.8 6199.05,2614.1 6212.25,2600.9 ; v1(7774.35,2340.2) 7769.15,2335 6564.85,2335 6292.35,2607.4 6218.85,2607.4 6212.25,2600.9 ; v1(7843.15,2236.7) 7901.25,2236.7 U8.13@7927.95,2210 ; U17.13@5692.95,2220.7 5717.05,2220.7 5958.65,2462.3 6102.55,2462.3 6205.75,2565.5 6205.75,2594.4 6212.25,2600.9
  Bottom Layer w6: v1(7774.35,2340.2) 7843.15,2271.4 v1(7843.15,2236.7)
P0.6: R19.1 R25.1 R27.1 R29.1 U9.2 | length 2720.8
  Top Layer w6: v1(4601.45,3314.8) 4674.75,3241.5 5826.75,3241.5 5874.25,3289 5890.55,3289 U9.2@5906.95,3289 6029.15,3289 6107.45,3367.3 6149.15,3367.3 v1(6235.05,3281.3)
  Bottom Layer w6: R19.1@4433.96,3410 4433.95,3371.4 4541.15,3371.4 4543.05,3373.2 ; R25.1@4560.45,3410 4560.45,3400.3 4560.45,3390.7 4543.05,3373.2 ; v1(4601.45,3314.8) 4543.05,3373.2 ; v1(6235.05,3281.3) 6330.05,3376.4 6592.05,3376.4 R27.1@6592.03,3415 6592.05,3453.6 6773.95,3453.6 R29.1@6773.95,3415
P1.2: U9.7 U11.5 | length 1960.9
  Top Layer w6: U9.7@5906.95,3446 6074.85,3446 6123.85,3397 7527.95,3397 U11.5@7753.95,3171
P1.3: U9.8 U11.6 | length 2032.1
  Top Layer w6: U9.8@5906.95,3478 6065.45,3478 6123.65,3419.9 7568.65,3419.9 7803.95,3184.5 U11.6@7803.95,3171
P1.5: U9.10 U11.7 | length 2107.4
  Top Layer w6: U9.10@5906.95,3541 6019.65,3541 6128.65,3432 7605.15,3432 7853.95,3183.2 U11.7@7853.95,3171
P1.A: U1.3 U15.15 | length 1321
  Top Layer w6: v1(2848.45,2287.8) 3415.75,2287.8 U15.15@3437.95,2310
  Bottom Layer w6: U1.3@2728.95,1615 2778.95,1665 2778.95,2218.3 v1(2848.45,2287.8)
P1.B: U1.6 U15.1 | length 1084.4
  Top Layer w6: U15.1@3219.95,2360 3245.25,2334.7 v1(3269.15,2334.7)
  Bottom Layer w6: U1.6@3028.95,1615 3067.25,1576.7 3247.05,1576.7 3282.15,1611.8 3282.15,1995.7 3253.65,2024.2 3253.65,2319.2 v1(3269.15,2334.7)
P1.C: U1.7 U15.2 | length 916.8
  Top Layer w6: v1(3188.85,2390) 3167.55,2368.6 3167.55,2351.3 3208.75,2310 U15.2@3219.95,2310
  Bottom Layer w6: U1.7@3128.95,1615 3188.85,1674.9 v1(3188.85,2390)
P1.D: U1.4 U15.3 | length 1047.8
  Top Layer w6: v1(3007.25,2247.1) 3207.05,2247.1 U15.3@3219.95,2260
  Bottom Layer w6: U1.4@2828.95,1615 2865.65,1578.3 2951.75,1578.3 2970.75,1597.4 2970.75,2210.6 v1(3007.25,2247.1)
P2.0: P1.2 U9.30 | length 5220.6
  Top Layer w6: U9.30@5450.95,3352 5641.25,3352 5880.35,3591.1 6113.65,3591.1 6128.75,3576.1 6845.25,3576.1 6925.55,3495.7 7576.85,3495.7 7845.35,3227.3 7921.35,3227.3 v1(7936.45,3212.3)
  Bottom Layer w6: v1(7936.45,3212.3) 7945.75,3202.9 7945.75,2850.6 7889.95,2794.9 7889.95,1898.9 8093.15,1695.7 8191.15,1695.7 8202.35,1684.5 8517.25,1684.5 8583.25,1618.5 8583.25,1607.3 8612.95,1577.6 8666.55,1577.6 P1.2@8823.95,1735
P2.1: R4.1 U9.31 | length 1043.4
  Top Layer w6: U9.31@5450.95,3321 5722.15,3321 v1(5831.15,3429.9)
  Bottom Layer w6: R4.1@5353.95,3770 5491.05,3770 v1(5831.15,3429.9)
P2.2: R5.1 U9.32 | length 644.8
  Top Layer w6: v1(5250.45,3500.7) 5418.25,3332.9 5418.25,3289 U9.32@5450.95,3289
  Bottom Layer w6: R5.1@5158.95,3775 5190.85,3775 5190.85,3560.3 v1(5250.45,3500.7)